# Altium PCB PCB1.PcbDoc
Units mil, origin at the board's own origin, x right, y up, seen from the top; angles counter-clockwise.
Board outline 1230 x 985 mil, 2 copper layers (Top Layer, Bottom Layer), stack 9.856 mil thick; 5 components, 4 nets, 17 pads, 31 vias.
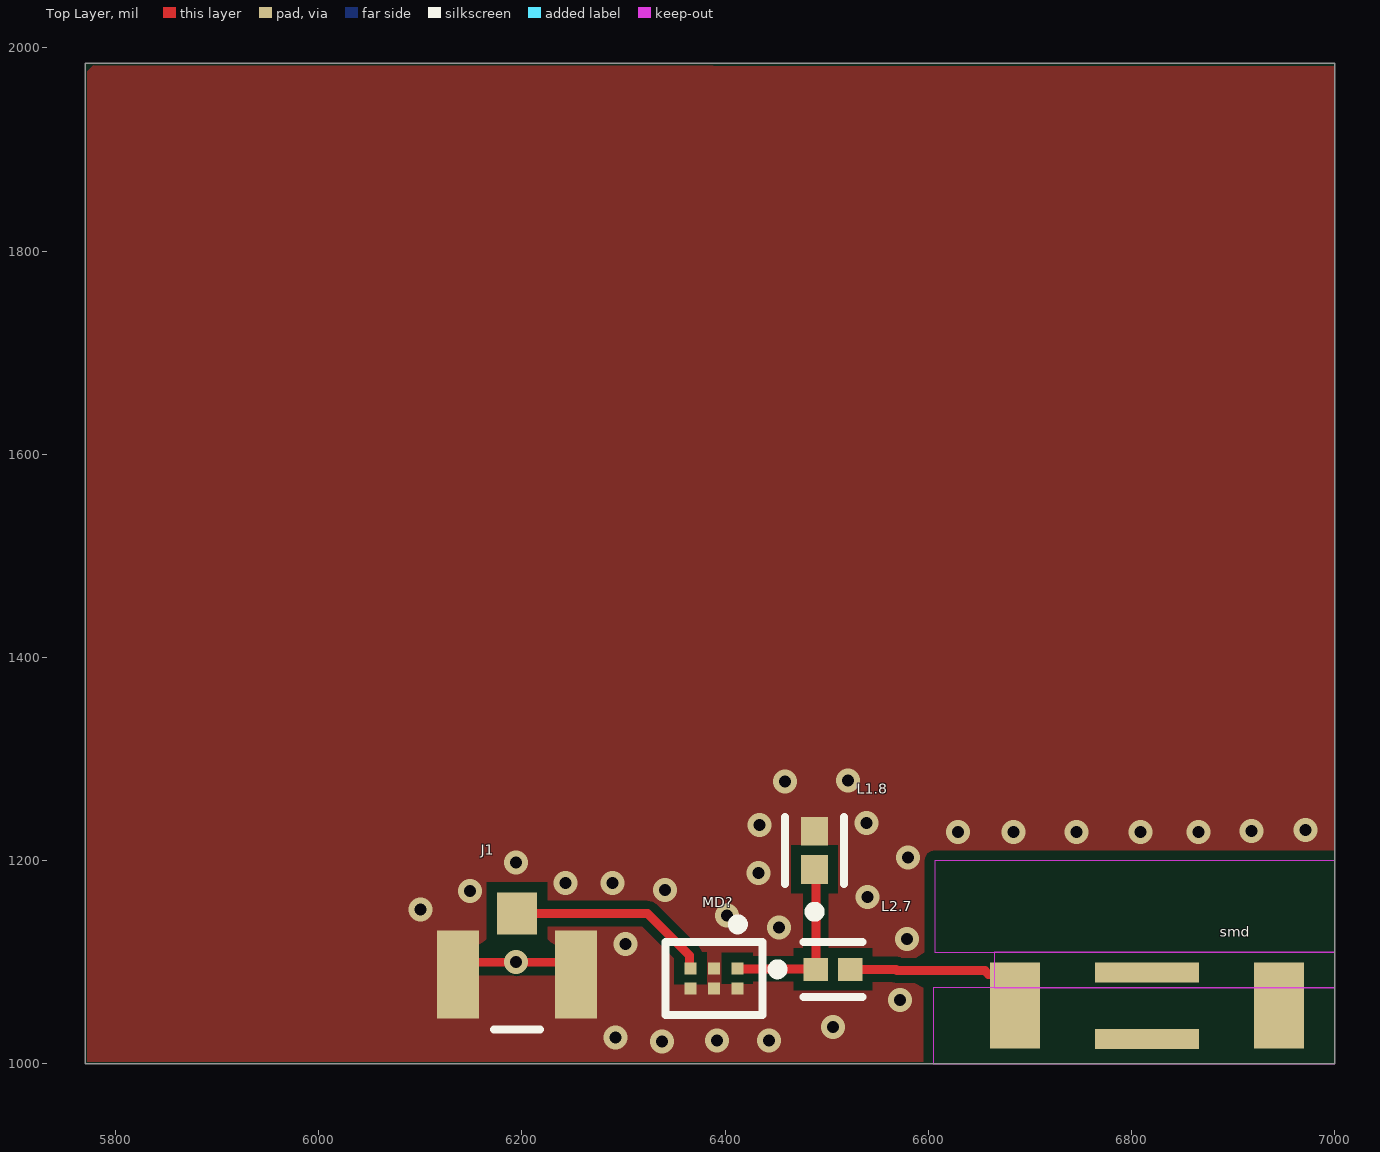
[diagram p0: Top Layer view]
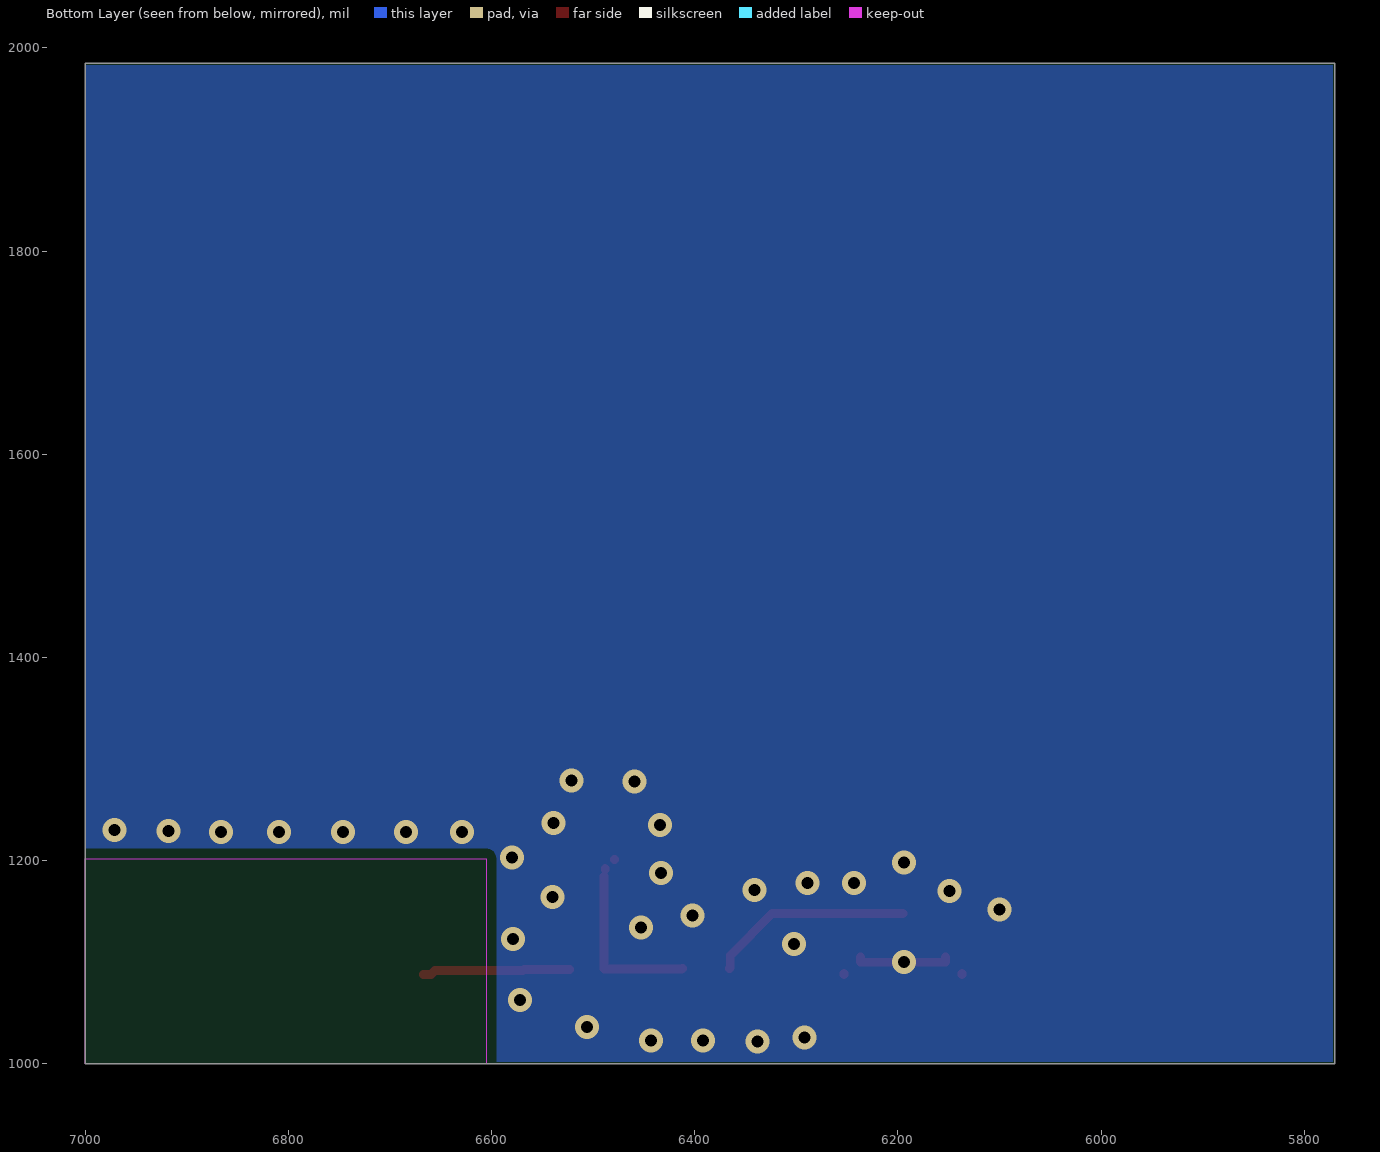
[diagram p1: Bottom Layer view, seen from below]
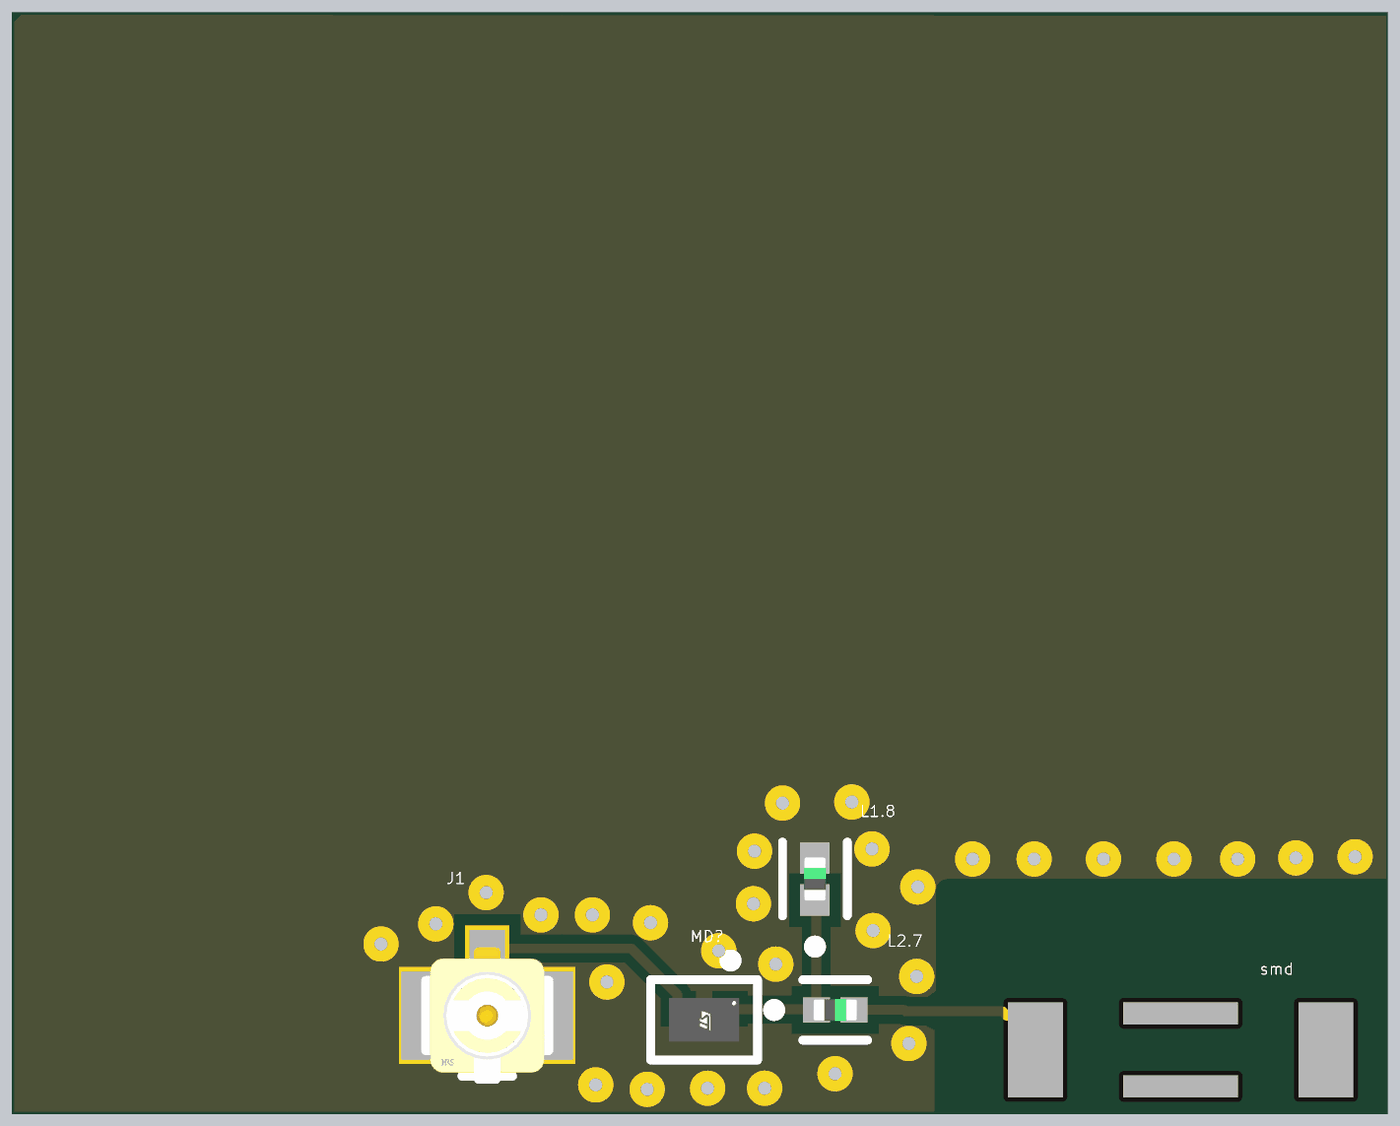
[diagram p2: 3D render of the assembled board from above, using the file's embedded part models]

## Layer stack, top to bottom
Top Solder: solder mask 0.5, Solder Resist, Dk 3.8
Top Layer: signal copper 1.378
Dielectric 1: dielectric 7.1, FR-4, Dk 4.6
Bottom Layer: signal copper 1.378
Bottom Solder: solder mask 0.5, Solder Resist, Dk 3.8

## Board outline
5770,1000 7000,1000 7000,1985 5770,1985

## Design rules (kind name [scope] priority, off if disabled: settings)
Clearance [All] p1: gap=10 ignorepadtopadclearanceinfootprint=TRUE except(3: Arc-SMDPad Track-SMDPad SMDPad-SMDPad; 8: Arc-Arc Arc-Track Arc-Fill Arc-Poly Arc-Region Track-Track Track-Fill Track-Poly Track-Region Via-Fill Via-Poly Via-Region)
MinimumSolderMaskSliver [All] p1: minsoldermaskwidth=9
PolygonConnect [All] p1: connectstyle=Direct reliefconductorwidth=10 reliefentries=4 polygonreliefangle="90 Angle" airgapwidth=10
RoutingVias [All] p1: holewidth=28 width=50 viastyle="Through Hole" minholewidth=28 minwidth=50 maxholewidth=28 maxwidth=50
ShortCircuit [All] p1: allowed=TRUE
SolderMaskExpansion [All] p1: expansion=4 istentingtop=FALSE
SupplyNets "Schematic Supply Nets" [InNet('GND')] p1: voltage=0.000
Width [All] p1: maxlimit=8.89 minlimit=8.78 preferedwidth=8.79 impedanceprofiledriven=TRUE impedanceprofileid={307840EC-45AE-4FF9-97A6-E0061B86EBF2} impedanceprofilevalue=50.000000 minimp=50.000000 maximp=50.000000 favimp=50.000000
28 further rules are at their usual default settings.

## Classes and differential pairs
component class "Rf schematic": J1 L1.8 MD? smd

## Components (designator, comment, footprint, x,y, rotation, side; value= is the part's Value field where it differs from the comment)
J1 "U.FL-R-SMT-1(10)" FP-U_FL-R-SMT-1_10-MFG 6195,1088 r0 top (schematic designator J?)
L1.8 "LQG15HN1N8C02D" FP-LQG15HH_02-IPC_A 6488,1210.16 r90 top
L2.7 "LQG15HN2N7C02D" FP-LQG15HH_02-IPC_B 6506.13,1093 r0 top
MD? "MLPF-WB55-01E3" FP-MLPF-WB55-01E3-MFG 6388.89,1084.16 r270 top
smd "Comment" ANT_JOHANSON_2450AT43B100E 6815,1057.32 r0 top

## Footprints (in the part's own frame and the unit in brackets; to place one, negate y for a bottom-side part, rotate by r counter-clockwise, add the part's x,y. Pads: shape width x height; smd on the part's side, far side on the other; paste and mask are expansions set on the pad)
ANT_JOHANSON_2450AT43B100E [mm] "2.4GHz SMD antenna"
  rect 1.25x2.15 smd: 1(-3.3,0) 2(3.3,0)
  rect 2.6x0.5 smd: 3(0,0.83) 4(0,-0.83)
  body extent -3.5,-1 3.5,1, height 2
FP-LQG15HH_02-IPC_A [mil]
  rect 28.16x26.48 smd paste+0 mask+0: 1(-18.84,0) 2(18.84,0)
  silkscreen extent -65,-29 33,29, body extent -41,-21 41,21, height 10
FP-LQG15HH_02-IPC_B [mil]
  rect 24.23x22.54 smd paste+0 mask+0: 1(-16.87,0) 2(16.87,0)
  silkscreen extent -59,-27 29,27, body extent -35,-17 35,17, height 10
FP-MLPF-WB55-01E3-MFG [mm]
  rect 0.3x0.3 smd paste-1000 mask-1000: A1(-0.25,0.587) A2(-0.25,0) A3(-0.25,-0.587) B1(0.25,0.587) B2(0.25,0) B3(0.25,-0.587)
  silkscreen extent -1.47,-1.21 0.91,1.21, body extent -1.01,-1.31 1.01,1.31, height 0.25
FP-U_FL-R-SMT-1_10-MFG [mm]
  rect 1x1.05 smd paste-1000 mask+0: 1(0,1.525)
  rect 1.05x2.2 smd paste-1000 mask+0: 2(-1.475,0) 3(1.475,0)
  silkscreen extent -0.58,-1.38 0.58,-1.38, body extent -2.1,-1.48 2.1,2.15, height 0.25

## Part data
J1: library part CMP-2000-05152-3, "CONN U.FL RCPT STR 50 OHM SMD", Dielectric Material=Polymer, Frequency=6GHz, Housing Color=Beige, Insulation Resistance=500MR, Max Operating Temperature=90°C, Min Operating Temperature=-40°C, Package Quantity=2500, Body Material=Bronze, Body Plating=Silver, Connector Type=Coaxial, Contact Material=Brass, Contact Plating=Gold, Depth=3.1mm, Fastening Type=Snap, Gender=Male, Impedance=50R, Lead Free="Lead Free", Length=3mm, Max Frequency=6GHz, Mount="Surface Mount", Orientation=Straight, Packaging="Cut Tape", Radiation Hardening=No, REACH SVHC="No SVHC", Series=U.FL, Termination=Solder, Weight=0.001764oz, Wire/Cable Type=Coaxial
L1.8: library part CMP-06042-004125-1, "Multilayer type RF Inductor 1.8nH ±0.2nH 0.08Ω 900mA 0402", Case Code (Imperial)=0402, Case Code (Metric)=1005, Current Rating=900mA, DC Resistance (DCR)=80mR, Inductance=1.8nH, Max Operating Temperature=125°C, Min Operating Temperature=-55°C, Self Resonant Frequency=6GHz, Test Frequency=100MHz, Case/Package=0402, Core Material=Air, Mount="Surface Mount", Packaging="Cut Tape", Shielding=Unshielded
L2.7: library part CMP-06042-003573-1, "Multilayer type RF Inductor 2.7nH ±0.2nH 0.1Ω 800mA 0402", Case Code (Imperial)=0402, Case Code (Metric)=1005, Current Rating=800mA, DC Resistance (DCR)=100mR, Inductance=2.7nH, Max Operating Temperature=125°C, Min Operating Temperature=-55°C, Self Resonant Frequency=6GHz, Test Frequency=100MHz, Case/Package=0402, Core Material=Air, Mount="Surface Mount", Packaging="Tape and Reel", Shielding=Unshielded
MD?: library part CMP-12074-000002-1, "RF FILTER LOW PASS 2.45GHZ 6SMD"
smd: library part Component_1

## Via types
v1: diameter 23.62, hole 11.81, Top Layer to Bottom Layer, 31 vias

## Nets (pads, with @x,y where several pads share a name; then routed paths per layer and width w, separated by ;. In a path a pad name is that pad's centre, name@x,y a point inside that pad or via, vN(x,y) a via of type N, cw(c..) or ccw(c..) an arc to the next point about the centre after c; other vN are vias at no path point)
GND: J1.2 J1.3 L1.8.2 MD?.A2 MD?.B1 MD?.B2 MD?.B3 | length 96.5
  Top Layer w8.79: J1.2 J1.2@6136.93,1088.73 ; J1.2@6153.2,1105 6153.2,1100 v1(6194,1100) ; v1@6195,1099 v1(6194,1100) ; J1.3@6236.8,1105 6236.8,1100 v1(6194,1100) ; J1.3 J1.3@6253.07,1088.73
  other v1: 6338,1022 6392,1023 6443,1023 6292,1026 6506,1036 6572,1063 6302,1118 6579,1123 6453,1134 6402,1146 6100,1152 6540,1164 6149,1170 6341,1171 6243,1178 6289,1178 6433,1188 6194,1198 6580,1203 6629,1228 6684,1228 6746,1228 6809,1228 6866,1228 6918,1229 6971,1230 6434,1235 6539,1237 6459,1278 6521,1279
NetJ?_1: J1.1 MD?.A3 | length 200
  Top Layer w8.79: J1.1 6323.43,1148.04 6365,1106.46 6365,1094.78 MD?.A3
NetL1.8_1: L1.8.1 L2.7.1 MD?.A1 | length 169.1
  Top Layer w8.79: MD?.A1 6412.5,1093.5 6488.75,1093.5 6489.25,1094 6489.25,1110 L1.8.1@6489.25,1184.48 ; L1.8.1@6479,1201 L1.8.1@6479.16,1201 ; L1.8.1 L1.8.1@6488,1192.16
NetL2.7_smd: L2.7.2 smd.1 | length 146.1
  Top Layer w8.79: L2.7.2 6567.95,1093 6569.16,1091.79 6655.6,1091.79 6659.4,1088 smd.1@6667,1088
pads on no net: smd.2 smd.3 smd.4

## Polygon pours and split planes (outlines as drawn)
GND on Bottom Layer "GND_L02_P000" (solid, pour order 0): 6605,1002 5772,1002 5772,1983 6999,1983 6999,1202 6605,1202
GND on Top Layer "GND_L01_P001" (solid, pour order 1): 5772,1983 5772,1002 6602,1002 6602,1202 6999,1202 6999,1981.99

## Keep-outs
Top Layer:
  rectangle: 6664.69,1075 7000,1110
  rectangle: 6605,1000 7000,1075
  rectangle: 6606.3,1110 7000,1200
Bottom Layer:
  rectangle: 6605,1000 7000,1202